# Altium PCB Holiday r2.PcbDoc (part 2 of 3)
Units mil, origin at the board's own origin, x right, y up, seen from the top; angles counter-clockwise.
Board outline 2637.8 x 2637.8 mil, 4 copper layers (Top Layer, Mid-Layer 1, InternalPlane1, Bottom Layer), stack 63.08 mil thick; 132 components, 142 nets, 636 pads, 407 vias.
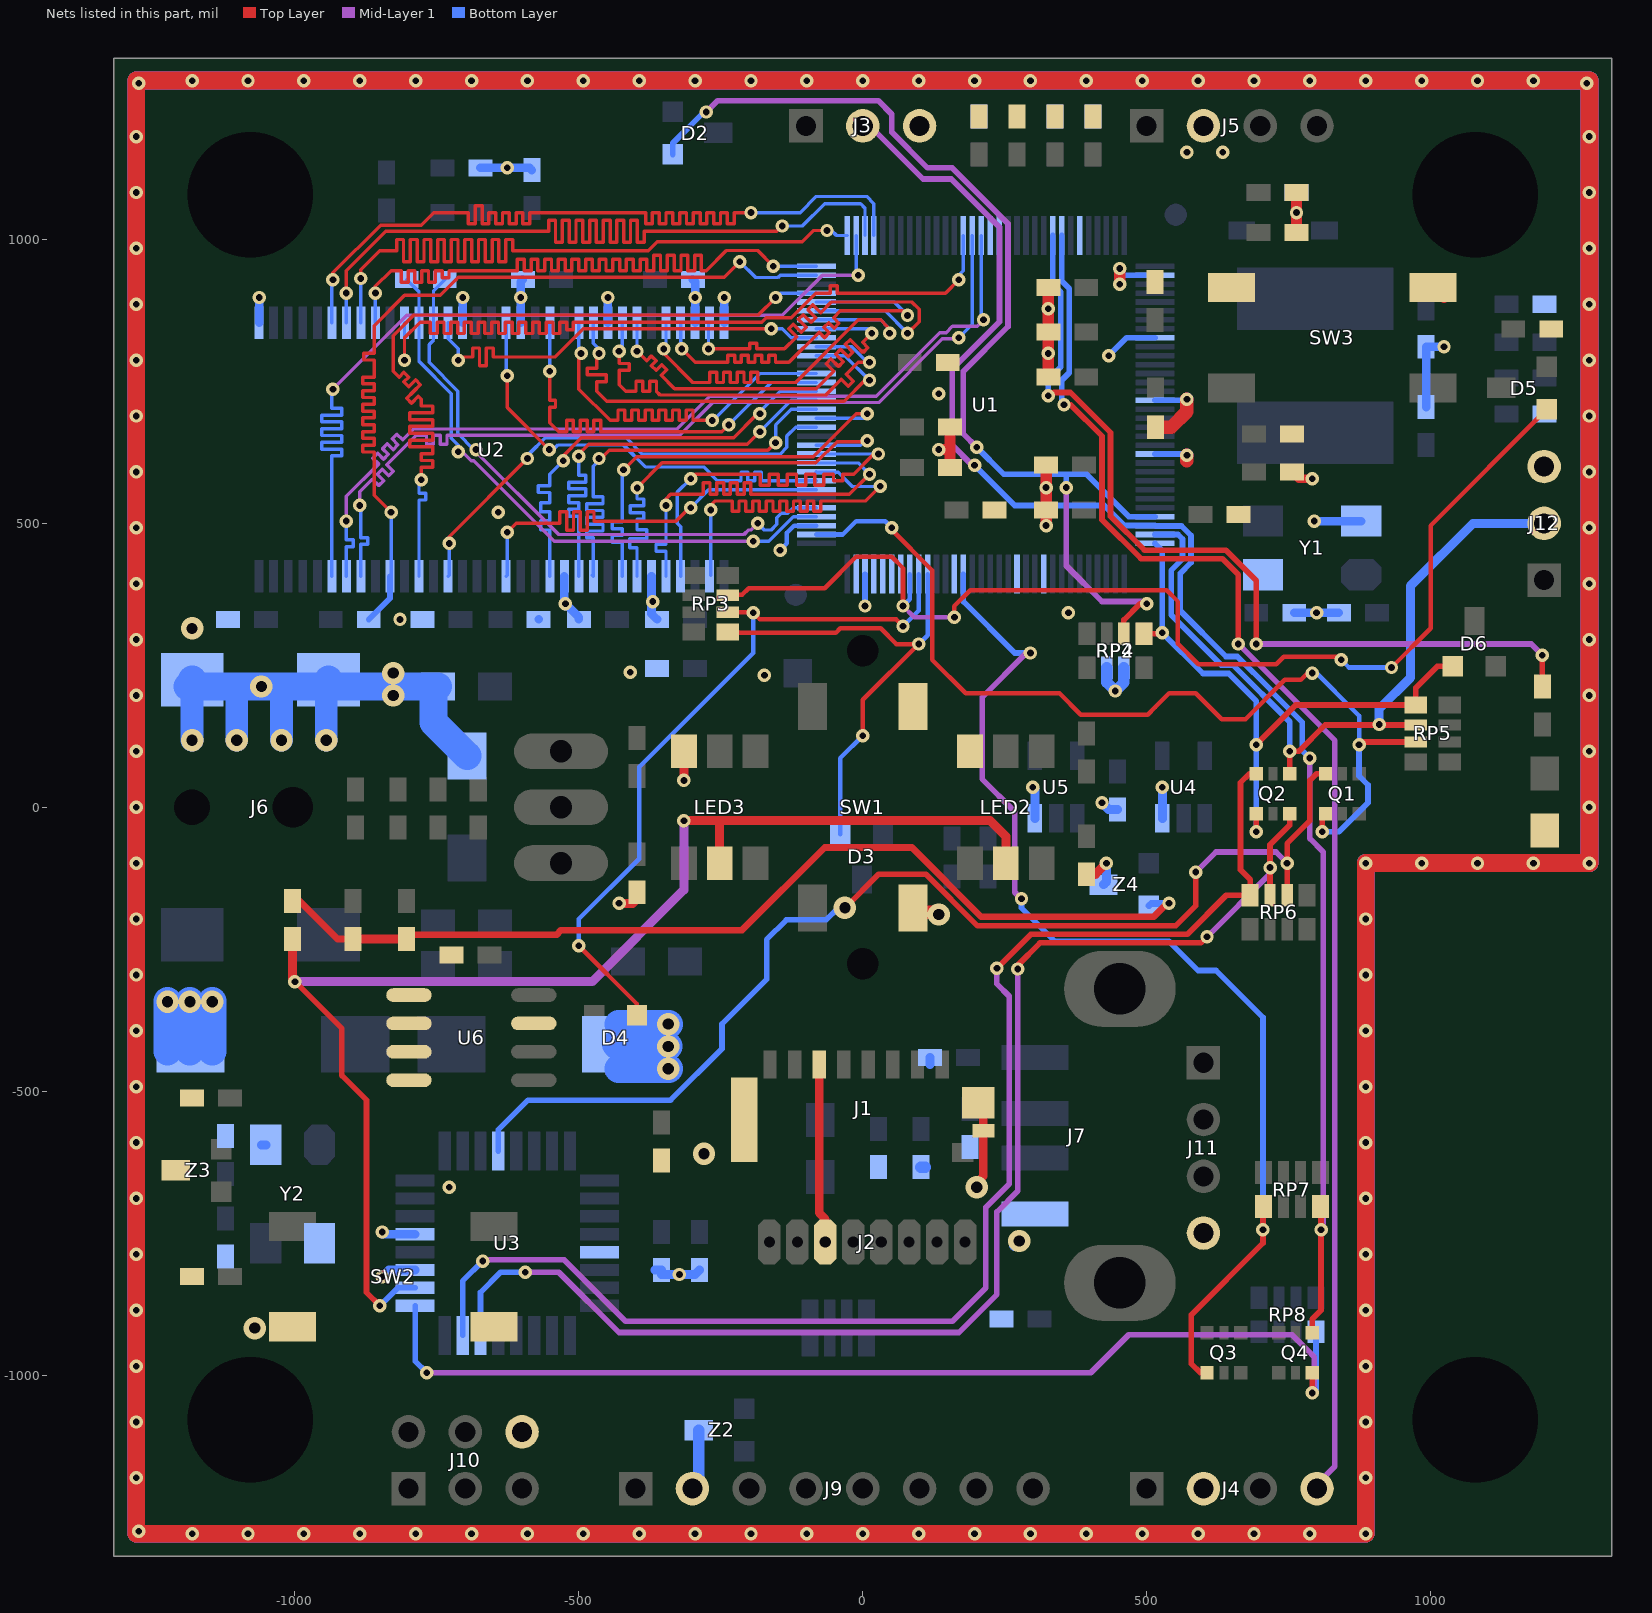
[diagram p4: the nets of this part, all layers, seen from the top]

## Via types
v1: diameter 23.62, hole 11.81, Top Layer to Bottom Layer, tented both sides, 373 vias
v2: diameter 39.37, hole 19.68, Top Layer to Bottom Layer, tented both sides, 33 vias
v3: diameter 35.43, hole 19.68, Top Layer to Bottom Layer, tented both sides, 1 vias

## Nets (pads, with @x,y where several pads share a name; then routed paths per layer and width w, separated by ;. In a path a pad name is that pad's centre, name@x,y a point inside that pad or via, vN(x,y) a via of type N, cw(c..) or ccw(c..) an arc to the next point about the centre after c; other vN are vias at no path point) (continued)
A8: U1.68 U2.39 | length 1645.9
  Top Layer w6: v1(-933.07,929.13) -933.07,940.94 -848.89,1025.13 -777.77,1025.13 -755.66,1047.24 -694.47,1047.24 -694.47,1027.9 -682.47,1027.9 -682.47,1059.24 -670.47,1059.24 -670.47,1027.9 -658.47,1027.9 -658.47,1047.24 -646.47,1047.24 -646.47,1027.9 -634.47,1027.9 -634.47,1047.24 -622.47,1047.24 -622.47,1027.9 -610.47,1027.9 -610.47,1047.24 -598.47,1047.24 -598.47,1027.9 -586.47,1027.9 -586.47,1047.24 -382.47,1047.24 -382.47,1027.9 -370.47,1027.9 -370.47,1047.24 -358.47,1047.24 -358.47,1027.9 -346.47,1027.9 -346.47,1047.24 -334.47,1047.24 -334.47,1027.9 -322.47,1027.9 -322.47,1047.24 -310.47,1047.24 -310.47,1027.9 -298.47,1027.9 -298.47,1047.24 -286.47,1047.24 -286.47,1027.9 -274.47,1027.9 -274.47,1047.24 -262.47,1047.24 -262.47,1027.9 -250.47,1027.9 -250.47,1047.24 -238.47,1047.24 -238.47,1027.9 -226.47,1027.9 -226.47,1047.24 v1(-196.85,1047.24)
  Bottom Layer w6: U2.39@-935.04,853.35 v1@-935.04,929.13 ; v1(-196.85,1047.24) -157.94,1047.24 -157.81,1047.12 -110.36,1047.12 -81.87,1075.61 7.06,1075.61 19.69,1062.99 U1.68@19.69,1006.89
A9: U1.67 U2.40 | length 1645.9
  Top Layer w6: v1(-909.45,905.51) -909.45,944.88 -840.2,1014.13 -553.06,1014.13 -553.06,1033.43 -541.06,1033.43 -541.06,994.82 -529.06,994.82 -529.06,1033.43 -517.06,1033.43 -517.06,994.82 -505.06,994.82 -505.06,1033.43 -493.06,1033.43 -493.06,994.82 -481.06,994.82 -481.06,1033.43 -469.06,1033.43 -469.06,994.82 -457.06,994.82 -457.06,1033.43 -445.06,1033.43 -445.06,994.82 -433.06,994.82 -433.06,1033.43 -421.06,1033.43 -421.06,994.82 -409.06,994.82 -409.06,1033.43 -397.06,1033.43 -397.06,994.82 -385.06,994.82 -385.06,1014.13 -151.23,1014.13 v1(-141.73,1023.62)
  Bottom Layer w6: U2.40@-909.45,853.35 v1(-909.45,905.51) ; v1(-141.73,1023.62) -106.3,1023.62 -66.93,1062.99 -3.94,1062.99 3.94,1055.12 U1.67@3.94,1006.89
A10: U1.66 U2.28 | length 1660.8
  Mid-Layer 1 w6: v1(-933.07,736.22) -803.15,866.14 -141.73,866.14 -70.87,937.01 v1(-7.87,937.01)
  Bottom Layer w6: U2.28@-935.04,406.5 -935.04,618.66 -917.37,618.66 -917.37,630.66 -952.71,630.66 -952.71,642.66 -917.37,642.66 -917.37,654.66 -952.71,654.66 -952.71,666.66 -917.37,666.66 -917.37,678.66 -952.71,678.66 -952.71,690.66 -917.37,690.66 -917.37,702.66 -935.04,702.66 -935.04,736.22 v1@-935.04,737.2 ; v1@-935.04,738.19 v1(-933.07,736.22) ; U1.66@-11.81,1006.89 -11.81,940.95 v1(-7.87,937.01)
A11: U1.65 U2.41 | length 1645.9
  Top Layer w6: v1(-883.86,931.1) -883.86,946.85 -850.39,980.32 -820.77,980.32 -820.77,999.84 -808.77,999.84 -808.77,960.79 -796.77,960.79 -796.77,999.84 -784.77,999.84 -784.77,960.79 -772.77,960.79 -772.77,999.84 -760.77,999.84 -760.77,960.79 -748.77,960.79 -748.77,999.84 -736.77,999.84 -736.77,960.79 -724.77,960.79 -724.77,999.84 -712.77,999.84 -712.77,960.79 -700.77,960.79 -700.77,999.84 -688.77,999.84 -688.77,960.79 -676.77,960.79 -676.77,999.84 -664.77,999.84 -664.77,960.79 -652.77,960.79 -652.77,999.84 -640.77,999.84 -640.77,960.79 -628.77,960.79 -628.77,999.84 -616.77,999.84 -616.77,980.32 -377.95,980.32 -362.2,996.06 -106.3,996.06 -86.61,1015.75 v1(-62.99,1015.75)
  Bottom Layer w6: U2.41@-883.86,853.35 v1(-883.86,931.1) ; v1(-62.99,1015.75) -55.12,1015.75 -46.26,1006.89 U1.65@-27.56,1006.89
A12: U1.64 U2.42 | length 1642.8
  Top Layer w6: v1(-858.27,905.51) -858.27,917.32 -830.71,944.88 -812.71,944.88 -812.71,924.88 -800.71,924.88 -800.71,944.88 -788.71,944.88 -788.71,924.88 -776.71,924.88 -776.71,944.88 -764.71,944.88 -764.71,924.88 -752.71,924.88 -752.71,944.88 -740.71,944.88 -740.71,932.78 -728.71,932.78 -728.71,944.88 -608.17,944.88 -608.17,964.88 -596.17,964.88 -596.17,944.88 -584.17,944.88 -584.17,964.88 -572.17,964.88 -572.17,944.88 -560.17,944.88 -560.17,964.88 -548.17,964.88 -548.17,944.88 -536.17,944.88 -536.17,964.88 -524.17,964.88 -524.17,944.88 -512.17,944.88 -512.17,964.88 -500.17,964.88 -500.17,944.88 -488.17,944.88 -488.17,964.88 -476.17,964.88 -476.17,944.88 -464.17,944.88 -464.17,964.88 -452.17,964.88 -452.17,944.88 -440.17,944.88 -440.17,964.88 -428.17,964.88 -428.17,944.88 -416.17,944.88 -416.17,964.88 -404.17,964.88 -404.17,944.88 -392.17,944.88 -392.17,964.88 -380.17,964.88 -380.17,944.88 -368.17,944.88 -368.17,972.44 -356.17,972.44 -356.17,944.88 -344.17,944.88 -344.17,972.44 -332.17,972.44 -332.17,944.88 -320.17,944.88 -320.17,972.44 -308.17,972.44 -308.17,944.88 -296.17,944.88 -296.17,972.44 -284.17,972.44 -284.17,944.88 -275.59,944.88 -240.03,980.44 -185.17,980.44 v1(-157.48,952.76)
  Bottom Layer w6: U2.42@-858.27,853.35 v1(-858.27,905.51) ; v1(-157.48,952.76) U1.64@-81.69,952.76
A_RXD: D6.1 Q2.4 RP4.1.1 RP5.1.1 U1.128 | length 1094.3
  Top Layer w10: RP4.1.1@494.88,305.59 526.06,305.59 v1(527.56,307.09) ; v1(692.91,-43.31) Q2.4@692.91,-11.81 ; v1(692.91,110.24) 762.6,179.92 RP5.1.1@973.94,179.92 973.94,210.16 1011.81,248.03 D6.1@1039.37,248.03
  Bottom Layer w10: U1.128@514.76,464.57 527.56,451.77 v1(527.56,307.09) 599.06,235.59 644.41,235.59 692.91,187.09 v1(692.91,110.24) v1(692.91,-43.31)
A_RXD_5V: Q2.3 RP6.4.1 U3.31 | length 2429.6
  Top Layer w10: v1(236.22,-283.46) 295.77,-223.92 571.36,-223.92 640.24,-155.04 RP6.4.1@682.28,-155.04 682.28,-127.17 665.35,-110.24 665.35,43.31 681.1,59.05 Q2.3@692.91,59.05
  Mid-Layer 1 w10: v1(-669.29,-799.21) -667.17,-797.09 -525.75,-797.09 -417.32,-905.51 157.48,-905.51 216.54,-846.46 216.54,-704.72 258.03,-663.23 258.03,-332.83 236.22,-311.02 v1(236.22,-283.46)
  Bottom Layer w10: U3.31@-704.73,-930.12 -704.73,-834.65 v1(-669.29,-799.21)
A_TXD: J12.2 Q2.1 RP5.2.1 U1.127 | length 1360.9
  Top Layer w10: Q2.1@751.97,59.05 v1(751.97,98.43) 767.72,98.43 814.21,144.92 RP5.2.1@973.94,144.92
  Bottom Layer w10: U1.127@514.76,480.32 555.12,480.32 562.99,472.44 562.99,437.01 543,417.02 543,339 631.41,250.59 651.86,250.59 751.97,150.48 v1(751.97,98.43)
  Bottom Layer w16: v1(909.45,145.67) 909.45,173.23 964.57,228.35 964.57,389.76 1074.8,500 J12.2@1200,500
A_TXD_5V: Q2.6 RP6.3.1 U3.30 | length 2346.5
  Top Layer w10: v1(273.03,-284.84) 273.03,-278.15 312.26,-238.92 595.73,-238.92 v1(606.3,-228.35) ; RP6.3.1@717.28,-155.04 v1(717.28,-106.3) 717.28,-66.18 751.97,-31.5 Q2.6@751.97,-11.81
  Mid-Layer 1 w10: v1(-594.49,-818.9) -535.43,-818.9 -429.13,-925.2 169.29,-925.2 236.22,-858.27 236.22,-712.6 273.03,-675.79 v1(273.03,-284.84) ; v1(606.3,-228.35) 716.54,-118.11 716.54,-107.05 v1(717.28,-106.3)
  Bottom Layer w10: U3.30@-673.23,-930.12 -673.23,-854.33 -637.8,-818.9 v1(-594.49,-818.9)
BA0: U1.79 U2.26 | length 1660.8
  Mid-Layer 1 w6: v1(-885.83,531.5) -885.83,555.58 -863.49,577.92 -852.14,566.57 -843.65,575.06 -855,586.4 -846.51,594.89 -835.17,583.54 -826.68,592.03 -838.03,603.37 -786.24,655.17 -768.24,655.17 -768.24,639.12 -756.24,639.12 -756.24,655.17 -744.24,655.17 -744.24,639.12 -732.24,639.12 -732.24,655.17 -322.17,655.17 -264.61,712.72 -172.9,712.72 -0.34,712.72 16.08,712.72 27.94,712.72 140.03,824.8 169.29,824.8 v1@171.26,824.8
  Bottom Layer w6: v1(-885.83,531.5) -883.86,529.53 -883.86,474.88 -871.86,474.88 -871.86,462.88 -883.86,462.88 U2.26@-883.86,406.5 ; v1(169.29,826.77) 192.79,850.27 192.79,1006.76 U1.79@192.91,1006.89
BA1: U1.80 U2.27 | length 1660.8
  Mid-Layer 1 w6: v1(-909.45,503.94) -909.45,547.51 -852.53,604.43 -862.77,614.66 -854.28,623.15 -844.05,612.91 -835.56,621.4 -845.8,631.63 -837.31,640.12 -827.08,629.88 -818.59,638.37 -828.83,648.61 -820.34,657.09 -810.11,646.85 -790.79,666.17 -326.73,666.17 -269.17,723.72 -168.34,723.72 -4.89,723.72 20.64,723.72 23.39,723.72 135.47,835.8 146.83,835.8 157.97,846.95 201.28,846.95 v1(212.6,858.27)
  Bottom Layer w6: U2.27@-909.45,406.5 -909.45,458.76 -897.45,458.76 -897.45,470.76 -909.45,470.76 v1(-909.45,503.94) ; U1.80@208.66,1006.89 208.66,858.27 208.66,854.33 v1(212.6,858.27)
CAS_N: U1.61 U2.22 | length 1660.8
  Top Layer w6: v1(-777.56,576.77) -777.56,598.6 -757.56,598.6 -757.56,610.6 -777.56,610.6 -777.56,622.6 -757.56,622.6 -757.56,634.6 -797.56,634.6 -797.56,646.6 -757.56,646.6 -757.56,658.6 -797.56,658.6 -797.56,670.6 -757.56,670.6 -757.56,682.6 -797.56,682.6 -797.56,694.6 -757.56,694.6 -757.56,706.6 -777.56,706.6 -777.56,718.5 -782.68,723.63 -794.72,711.59 -803.2,720.08 -791.17,732.11 -779.13,744.15 -787.62,752.63 -799.65,740.6 -808.14,749.08 -799.65,757.57 -808.14,766.05 -816.62,757.57 -826.9,767.84 -826.9,795.73 -826.77,795.86 -826.77,830.71 -790.65,866.83 -184.35,866.83 v1(-153.54,897.64)
  Bottom Layer w6: U2.22@-781.5,406.5 -781.5,541.06 -769.5,541.06 -769.5,553.06 -781.5,553.06 -781.5,576.77 v1(-777.56,576.77) ; v1(-153.54,897.64) -145.67,905.51 U1.61@-81.69,905.51
CKE: U1.78 U2.44 | length 1658.4
  Top Layer w6: v1(-807.09,787.4) -807.09,826.77 -779.53,854.33 -761.53,854.33 -761.53,834.33 -749.53,834.33 -749.53,854.33 -737.53,854.33 -737.53,834.33 -725.53,834.33 -725.53,854.33 -713.53,854.33 -713.53,834.33 -701.53,834.33 -701.53,854.33 -689.53,854.33 -689.53,834.33 -677.53,834.33 -677.53,854.33 -665.53,854.33 -665.53,834.33 -653.53,834.33 -653.53,854.33 -641.53,854.33 -641.53,834.33 -629.53,834.33 -629.53,854.33 -617.53,854.33 -617.53,834.33 -605.53,834.33 -605.53,854.33 -593.53,854.33 -593.53,834.33 -581.53,834.33 -581.53,854.33 -569.53,854.33 -569.53,834.33 -557.53,834.33 -557.53,854.33 -545.53,854.33 -545.53,834.33 -533.53,834.33 -533.53,854.33 -521.53,854.33 -521.53,840.67 -509.53,840.67 -509.53,854.33 -177.62,854.33 -169.62,862.33 -125.86,862.33 -82.68,905.51 -56.99,905.51 -56.99,918.49 -44.99,918.49 -44.99,905.51 145.67,905.51 v1(169.29,929.13)
  Bottom Layer w6: v1(-807.09,787.4) U2.44@-807.09,853.35 ; v1(169.29,929.13) 169.29,937.01 177.17,944.88 U1.78@177.17,1006.89
CLK_N: R3.1 U1.37 U2.46 | length 1052.7
  Mid-Layer 1 w6: v1(-681.1,629.92) -685.04,629.92 -683.07,627.95 -535.43,480.32 -209.12,480.32 -201.12,488.31 -196.72,488.31 v1(-185.04,500)
  Bottom Layer w6: R3.1@-736.22,929.13 -755.91,909.45 U2.46@-755.91,853.35 -755.91,822.83 -763.78,814.96 -763.78,783.27 -713.41,732.9 -713.41,658.29 -685.04,629.92 v1(-681.1,629.92) ; v1(-185.04,500) -173.23,488.19 -161.42,488.19 -151.57,498.03 -151.57,509.84 -143.7,517.72 -131.89,517.72 -122.05,527.56 U1.37@-81.69,527.56
CLK_P: R3.2 U1.36 U2.45 | length 1052.6
  Mid-Layer 1 w6: v1@-708.89,629.69 -689.31,610.11 -684.91,610.11 -543.31,468.5 v1(-192.91,468.5)
  Bottom Layer w6: R3.2@-803.13,929.13 -781.5,907.5 U2.45@-781.5,853.35 -781.5,785.43 -724.41,728.35 -724.41,649.61 -712.6,637.8 v1(-712.6,625.98) ; v1(-192.91,468.5) -165.35,468.5 -122.05,511.81 U1.36@-81.69,511.81
CS_N: R2.1 U1.63 U2.24 | length 1658.5
  Top Layer w6: v1(-830.71,519.68) -860.58,549.56 -860.58,625.59 -880.58,625.59 -880.58,637.59 -860.58,637.59 -860.58,649.59 -880.58,649.59 -880.58,661.59 -860.58,661.59 -860.58,673.59 -880.58,673.59 -880.58,685.59 -860.58,685.59 -860.58,697.59 -880.58,697.59 -880.58,709.59 -860.58,709.59 -860.58,721.59 -880.58,721.59 -880.58,733.59 -860.58,733.59 -860.58,745.59 -880.58,745.59 -880.58,757.59 -860.58,757.59 -860.58,787.59 -878.81,787.59 -878.81,799.59 -860.58,799.59 -860.58,848.08 -807.09,901.57 -744.09,901.57 -735.54,910.13 -735.54,910.4 -717.49,928.45 -717.22,928.45 -712.6,933.07 -244.09,933.07 v1(-216.54,960.63)
  Bottom Layer w6: U2.24@-830.71,408.46 v1(-830.71,519.68) ; v1(-216.54,960.63) -188.85,932.94 -149.27,932.94 -145.21,937.01 U1.63@-81.69,937.01
  Bottom Layer w10: R2.1@-870.08,330.71 -832.68,368.11 U2.24@-832.68,406.5
D0: U1.41 U2.2 | length 823.9
  Top Layer w6: v1(-267.72,523.62) -267.72,531.5 -259.84,539.37 -230.03,539.37 -230.03,520.97 -218.03,520.97 -218.03,539.37 -206.03,539.37 -206.03,520.97 -194.03,520.97 -194.03,539.37 -182.03,539.37 -182.03,521.18 -170.03,521.18 -170.03,539.37 -158.03,539.37 -158.03,520.97 -146.03,520.97 -146.03,539.37 -134.03,539.37 -134.03,520.97 -122.03,520.97 -122.03,539.37 -110.03,539.37 -110.03,520.97 -98.03,520.97 -98.03,539.37 -86.03,539.37 -86.03,520.97 -74.03,520.97 -74.03,539.37 5.04,539.37 v1(30.79,565.12)
  Bottom Layer w6: U2.2@-267.72,408.46 v1(-267.72,523.62) v1@-267.72,531.5 ; U1.41@-81.69,590.55 -80.87,589.73 -43.1,589.73 -18.18,564.8 30.48,564.8 v1(30.79,565.12)
D1: U1.43 U2.4 | length 823.9
  Top Layer w6: v1(-303.15,578.74) -295.28,586.61 -180.72,586.61 -180.72,566.93 -164.72,566.93 -164.72,586.61 -148.72,586.61 -148.72,566.93 -132.72,566.93 -132.72,586.61 -116.72,586.61 -116.72,566.93 -100.72,566.93 -100.72,586.61 -84.72,586.61 -84.72,566.93 -68.72,566.93 -68.72,586.61 -51.56,586.61 -51.56,574.61 -35.56,574.61 -35.56,586.61 -16.21,586.61 19.23,622.05 v1(27.56,622.05)
  Bottom Layer w6: U2.4@-320.87,406.5 -320.87,494.09 -326.65,499.87 -326.65,539.83 -326.77,539.95 -326.77,555.12 v1(-303.15,578.74) ; U1.43@-81.69,622.05 v1(27.56,622.05)
D2: U1.42 U2.5 | length 829.9
  Top Layer w6: v1(-346.46,531.5) -346.46,543.31 -338.58,551.18 -281.02,551.18 -281.02,571.18 -269.02,571.18 -269.02,551.18 -257.02,551.18 -257.02,571.18 -245.02,571.18 -245.02,551.18 -233.02,551.18 -233.02,571.18 -221.02,571.18 -221.02,551.18 -209.02,551.18 -209.02,571.18 -197.02,571.18 -197.02,551.18 -23.62,551.18 v1(11.81,586.61)
  Mid-Layer 1 w6: v1(11.81,586.61) v1@11.81,594.49
  Bottom Layer w6: U2.5@-346.46,406.5 -346.46,450.88 -364.2,450.88 -364.2,462.88 -346.46,462.88 v1(-346.46,531.5) v1@-346.46,543.31 ; U1.42@-81.69,606.3 -7.87,606.3 v1(11.81,586.61)
D3: U1.44 U2.7 | length 830.8
  Top Layer w6: v1(-396.99,562.34) -396.99,562.99 -353.56,606.42 -82.75,606.42 -45.31,643.86 2.13,643.86 5.9,647.64 7.87,649.61 v1(7.87,645.67)
  Bottom Layer w6: U2.7@-397.64,406.5 -397.64,456.82 -410.07,456.82 -410.07,472.82 -380.11,472.82 -380.11,488.82 -397.64,488.82 -397.64,506.82 -385.64,506.82 -385.64,518.82 -409.64,518.82 -409.64,530.82 -385.64,530.82 -385.64,542.82 -397.64,542.82 v1@-397.64,561.69 ; U1.44@-81.69,637.8 -3.94,637.8 5.9,647.64 7.87,649.61 v1(7.87,645.67)
D4: U1.47 U2.8 | length 830.8
  Top Layer w6: v1(-421.26,594.49) -398.33,617.42 -87.31,617.42 -11.81,692.91 v1(7.87,692.91)
  Bottom Layer w6: U2.8@-423.23,406.5 -423.23,466.63 -441.49,466.63 -441.49,478.63 -423.23,478.63 -423.23,490.63 -441.49,490.63 -441.49,502.63 -423.23,502.63 -423.23,592.52 v1(-421.26,594.49) ; U1.47@-81.69,685.04 3.94,685.04 v1@7.87,688.98 ; v1@7.87,685.04 v1@7.87,688.98 ; v1(7.87,692.91) v1@7.87,688.98
D5: U1.48 U2.10 | length 830.8
  Top Layer w6: v1(-464.57,614.17) -464.57,610.24 -462.6,612.2 -446.39,628.42 -166.86,628.42 v1(-153.54,641.73)
  Bottom Layer w6: U2.10@-476.38,408.46 U2.10@-474.41,406.5 -474.41,474.5 -486.41,474.5 -486.41,486.5 -457.49,486.5 -457.49,498.5 -486.41,498.5 -486.41,510.5 -457.49,510.5 -457.49,522.5 -486.41,522.5 -486.41,534.5 -457.49,534.5 -457.49,546.5 -474.41,546.5 -474.41,600.39 -464.57,610.24 v1(-464.57,614.17) ; v1(-153.54,641.73) -153.54,673.23 -125.98,700.79 U1.48@-81.69,700.79
D6: U1.49 U2.11 | length 830.8
  Top Layer w6: v1@-501.74,620.31 -482.63,639.42 -203.1,639.42 v1(-181.1,661.42) ; v1(-500,618.11) -499.54,618.11 v1@-496.19,614.76
  Bottom Layer w6: U2.11@-500,406.5 -500,512.55 -517.69,512.55 -517.69,524.55 -500,524.55 -500,536.55 -517.69,536.55 -517.69,548.55 -488,548.55 -488,560.55 -517.69,560.55 -517.69,572.55 -488,572.55 -488,584.55 -500,584.55 v1(-500,618.11) ; v1(-181.1,661.42) -138.12,704.4 -125.98,716.54 U1.49@-81.69,716.54
D7: U1.50 U2.13 | length 827.3
  Top Layer w6: v1(-527.56,610.24) -527.56,618.57 -495.71,650.42 -227.54,650.42 -188.98,688.98 -185.04,688.98 v1(-181.1,692.91)
  Bottom Layer w6: U2.13@-551.18,406.5 -551.18,488.32 -566.92,488.32 -566.92,504.32 -551.18,504.32 -551.18,520.32 -566.92,520.32 -566.92,536.32 -551.18,536.32 -551.18,554.32 -571.18,554.32 -571.18,566.32 -551.18,566.32 -551.18,586.61 v1(-527.56,610.24) ; v1@-188.98,688.98 -183.07,694.88 -145.67,732.28 U1.50@-81.69,732.28
D8: U1.51 U2.54 | length 828.1
  Top Layer w6: v1(-551.18,767.72) -551.18,716.44 -541.18,716.44 -541.18,704.44 -551.18,704.44 -551.18,677.16 -535.43,661.42 -521.56,661.42 -521.56,681.42 -509.56,681.42 -509.56,661.42 -497.56,661.42 -497.56,681.42 -485.56,681.42 -485.56,661.42 -473.56,661.42 -473.56,681.42 -461.56,681.42 -461.56,661.42 -248.03,661.42 v1(-236.22,673.23)
  Bottom Layer w6: v1(-551.18,767.72) U2.54@-551.18,853.35 ; v1(-236.22,673.23) -161.42,748.03 U1.51@-81.69,748.03
D9: U1.52 U2.56 | length 823.9
  Top Layer w6: v1(-496.06,799.21) -500,799.21 -500,736.22 -445.01,681.23 -431.01,681.23 -431.01,699.59 -419.01,699.59 -419.01,681.23 -407.01,681.23 -407.01,699.59 -395.01,699.59 -395.01,681.23 -383.01,681.23 -383.01,699.59 -371.01,699.59 -371.01,681.23 -359.01,681.23 -359.01,699.59 -347.01,699.59 -347.01,681.23 -335.01,681.23 -335.01,699.59 -323.01,699.59 -323.01,681.23 -311.01,681.23 -311.01,699.59 -299.01,699.59 -299.01,681.23 v1(-264.84,681.23)
  Bottom Layer w6: U2.56@-500,853.35 -500,807.09 -501.97,805.12 -503.94,803.15 -500,799.21 v1(-496.06,799.21) ; v1(-264.84,681.23) -263.65,681.23 -181.1,763.78 U1.52@-81.69,763.78
D10: U1.54 U2.57 | length 825.6
  Top Layer w6: v1(-464.57,799.21) -460.63,799.21 -462.6,797.24 -468.5,791.34 -468.5,773.34 -485.49,773.34 -485.49,761.34 -451.51,761.34 -451.51,749.34 -468.5,749.34 -468.5,732.28 -451.25,715.03 -33,715.03 v1@3.94,751.97
  Mid-Layer 1 w6: v1@3.94,751.97 v1(11.81,751.97)
  Bottom Layer w6: U2.57@-474.41,853.35 -474.41,816.93 -460.63,803.15 -460.63,799.21 -460.63,795.28 v1(-464.57,799.21) ; U1.54@-81.69,795.28 -31.5,795.28 v1(11.81,751.97)
D11: U1.55 U2.59 | length 823.9
  Top Layer w6: v1(-429.13,803.15) -429.13,781.4 -411.19,781.4 -411.19,769.4 -429.13,769.4 -429.13,744.09 -417.32,732.28 -399.32,732.28 -399.32,750.23 -387.32,750.23 -387.32,732.28 -375.32,732.28 -375.32,750.23 -363.32,750.23 -363.32,732.28 -357.07,726.03 -65.31,726.03 -37.57,753.76 -25.53,741.72 -17.04,750.2 -29.09,762.25 -7.88,783.46 v1(11.81,783.46)
  Bottom Layer w6: v1(-429.13,803.15) -423.23,809.05 U2.59@-423.23,853.35 ; U1.55@-81.69,811.02 -19.69,811.02 v1@5.91,785.43
D12: U1.57 U2.60 | length 824.4
  Top Layer w6: v1(-397.64,803.15) -380.7,786.22 -372.22,794.7 -363.73,786.22 -372.22,777.73 -363.73,769.24 -353.83,779.15 -345.34,770.67 -355.25,760.76 -331.52,737.03 -81.86,737.03 -51.22,767.68 -64.66,781.13 -56.18,789.61 -42.73,776.16 -34.25,784.65 -47.69,798.1 -39.21,806.58 -25.76,793.14 -17.28,801.62 -30.72,815.07 -22.24,823.55 -8.79,810.11 0.46,800.86 8.94,809.34 -0.3,818.59 v1(15.75,834.64)
  Bottom Layer w6: v1(-397.64,803.15) U2.60@-397.64,853.35 ; U1.57@-81.69,842.52 7.87,842.52 v1(15.75,834.64)
D13: U1.58 U2.62 | length 824.4
  Top Layer w6: v1(-350.39,807.09) -350.39,799.21 -299.21,748.03 -269.21,748.03 -269.21,765.78 -257.21,765.78 -257.21,748.03 -245.21,748.03 -245.21,765.78 -233.21,765.78 -233.21,748.03 -221.21,748.03 -221.21,765.78 -209.21,765.78 -209.21,748.03 -197.21,748.03 -197.21,765.78 -185.21,765.78 -185.21,748.03 -118.11,748.03 -7.87,858.27 31.5,858.27 43.48,846.28 43.48,834.64 v1(47.24,834.64)
  Bottom Layer w6: v1(-350.39,807.09) -346.46,811.02 U2.62@-346.46,853.35 ; U1.58@-81.69,858.27 31.5,858.27 43.48,846.28 43.48,834.64 v1(47.24,834.64)
D14: U1.60 U2.63 | length 824.4
  Top Layer w6: v1(-318.9,807.09) -295.28,783.46 -237.72,783.46 -237.72,796.09 -225.72,796.09 -225.72,783.46 -213.72,783.46 -213.72,796.09 -201.72,796.09 -201.72,783.46 -189.72,783.46 -189.72,796.09 -177.72,796.09 -177.72,783.46 -165.72,783.46 -165.72,796.09 -153.72,796.09 -153.72,783.46 -129.92,783.46 -76.94,836.44 -67.4,826.9 -58.91,835.38 -68.46,844.93 -59.97,853.41 -50.43,843.87 -41.94,852.36 -51.49,861.9 -39.37,874.02 70.86,874.02 v1(78.74,866.14)
  Bottom Layer w6: U2.63@-320.87,853.35 -320.87,807.09 -320.87,805.12 v1(-318.9,807.09) ; U1.60@-81.69,889.76 55.12,889.76 v1(78.74,866.14)
D15: U1.59 U2.65 | length 829.4
  Top Layer w6: v1(-271.65,807.09) -198.72,807.09 -198.72,817.09 -186.72,817.09 -186.72,807.09 -137.8,807.09 -116.58,828.3 -130.72,842.44 -122.24,850.93 -108.1,836.79 -99.61,845.27 -113.49,859.15 -105,867.63 -91.13,853.76 -82.64,862.24 -96.52,876.12 -88.03,884.6 -74.16,870.73 -55.12,889.76 86.61,889.76 99.41,876.97 99.41,855.31 v1(78.74,834.64) v1@74.8,838.58
  Bottom Layer w6: v1(-271.65,807.09) -271.65,851.38 U2.65@-269.68,853.35 ; U1.59@-81.69,874.02 39.37,874.02 v1(78.74,834.64)
D_RXD: D2.1 RP4.2.1 U1.125 | length 1962.6
  Top Layer w10: v1@354.33,559.06 v1(358.27,562.99) ; RP4.2.1@459.88,305.59 459.88,329.96 488.19,358.27 v1(500,358.27)
  Mid-Layer 1 w10: v1(-275.59,1224.41) -255.91,1244.09 27.56,1244.09 51.18,1220.47 51.18,1188.98 114.17,1125.98 157.48,1125.98 255.91,1027.56 255.91,846.46 177.17,767.72 177.17,657.48 v1(200.79,633.86) ; v1(358.27,562.99) 358.27,425.2 421.26,362.2 496.06,362.2 v1(500,358.27)
  Bottom Layer w10: D2.1@-334.64,1149.61 -334.64,1169.29 -279.53,1224.41 v1(-275.59,1224.41) ; v1(200.79,633.86) 248.03,586.61 358.27,586.61 ; v1(358.27,562.99) 358.27,586.61 ; U1.125@514.76,511.81 468.5,511.81 393.7,586.61 358.27,586.61
D_TXD: J3.2 Q4.1 RP7.4.1 U1.126 | length 2796.9
  Top Layer w10: Q4.1@791.34,-925.2 791.34,-901.57 807.09,-885.83 v1(807.09,-744.09) 807.09,-704.41 RP7.4.1@805.91,-703.23
  Mid-Layer 1 w10: J3.2@0,1200 12.6,1200 106.3,1106.3 155.95,1106.3 240.91,1021.35 240.91,855.08 157.48,771.65 157.48,637.8 192.91,602.36 v1(196.85,602.36) ; v1(787.4,86.61) 787.4,-55.12 811.02,-78.74 811.02,-740.16 v1(807.09,-744.09)
  Bottom Layer w10: v1(196.85,602.36) 267.72,531.5 425.2,531.5 460.63,496.06 U1.126@514.76,496.06 515.51,495.32 561.33,495.32 577.99,478.65 577.99,430.79 559,411.8 559,346 639.41,265.59 659.61,265.59 719.71,205.49 719.71,203.96 773.78,149.89 773.78,100.24 v1(787.4,86.61)
D_TXD_5V: Q4.6 RP8.1.1 U3.1 | length 1943.2
  Top Layer w10: v1(791.34,-1031.5) Q4.6@791.34,-996.06
  Mid-Layer 1 w10: v1(-767.72,-996.06) 401.57,-996.06 468.5,-929.13 755.91,-929.13 795.28,-968.5 795.28,-1023.62 v1@789.37,-1029.53
  Bottom Layer w10: U3.1@-788.39,-877.95 -788.39,-975.39 v1(-767.72,-996.06) ; v1(791.34,-1031.5) 798.03,-1024.8 RP8.1.1@798.03,-923.7
DEBUG: J4.4 U1.89 | length 2520.9
  Top Layer w10: v1(354.33,708.66) 366.14,708.66 421.26,653.54 421.26,506.35 489.85,437.76 633.11,437.76 661.42,409.45 v1(661.42,287.4)
  Mid-Layer 1 w10: v1(661.42,287.4) 831.46,117.36 831.46,-1160.67 800,-1192.13 J4.4@800,-1200
  Bottom Layer w10: U1.89@350.39,1006.89 350.39,926.73 363.58,913.54 363.58,765.16 350.39,751.97 350.39,712.6 v1(354.33,708.66)
DOUT: LED2.2 LED3.2 R9.2 U3.2 | length 2358.7
  Top Layer w10: v1(-1000,-307.09) -917.32,-389.76 -917.32,-472.44 -874.02,-515.75 -874.02,-854.33 v1(-850.39,-877.95)
  Top Layer w16: R9.2@-1003.94,-232.27 -1003.94,-303.15 v1(-1000,-307.09) ; v1(-314.96,-23.62) -251.97,-23.62 ; LED3.2@-251.97,-98.43 -251.97,-23.62 ; LED2.2@251.97,-98.43 251.97,-51.18 224.41,-23.62 -251.97,-23.62
  Mid-Layer 1 w16: v1(-1000,-307.09) -476.38,-307.09 -314.96,-145.67 v1(-314.96,-23.62)
  Bottom Layer w10: v1(-850.39,-877.95) -818.9,-846.46 U3.2@-788.39,-846.46
DOUT2: L6.1 R9.1 R15.1 Z4.2 | length 1728.3
  Top Layer w12: L6.1@-803.15,-224.66 -539.37,-224.66 -531.24,-216.54 -212.6,-216.54 -66.93,-70.87 86.61,-70.87
  Top Layer w12.01: R9.1@-1003.94,-165.35 -992.13,-165.35 -925.21,-232.27 R15.1@-897.64,-232.27 ; 86.61,-70.87 208.66,-192.91 511.81,-192.91 v1@535.43,-169.29
  Top Layer w16: R15.1@-897.64,-232.27 L6.1@-803.15,-232.28
  Bottom Layer w12.01: Z4.2@503.94,-173.43 508.07,-169.29 v1(539.37,-169.29)
DQM0: U1.46 U2.20 | length 826.7
  Top Layer w6: v1(-728.35,464.57) -728.35,476.38 v1(-590.55,614.17)
  Bottom Layer w6: U2.20@-730.31,406.5 -728.35,408.46 v1(-728.35,464.57) ; v1@-587.82,622.05 -559.45,650.42 -416.51,650.42 -388.02,621.92 -145.34,621.92 -133.63,633.63 -133.63,653.77 -118.11,669.29 U1.46@-81.69,669.29
DQM1: U1.56 U2.47 | length 825.6
  Top Layer w6: v1@-712.6,792.96 -686.91,792.96 -686.91,808.7 -674.91,808.7 -674.91,777.23 -662.91,777.23 -662.91,808.7 -650.91,808.7 -650.91,792.96 -541.68,792.96 -492.13,842.52 v1(-161.42,842.52)
  Bottom Layer w6: U2.47@-730.31,853.35 -730.31,824.8 -712.6,807.09 v1(-712.6,787.4) ; v1(-161.42,842.52) -141.73,842.52 -125.98,826.77 U1.56@-81.69,826.77
DQS0: U1.39 U2.16 | length 833.1
  Top Layer w6: v1(-625.98,484.25) -610.24,500 -533.37,500 -533.37,520.31 -521.37,520.31 -521.37,487.56 -509.37,487.56 -509.37,520.31 -497.37,520.31 -497.37,487.56 -485.37,487.56 -485.37,520.31 -473.37,520.31 -473.37,503.94 -328.9,503.94 -304.21,528.62 v1@-300.15,532.68
  Mid-Layer 1 w6: v1(-303.15,527.56) -300.15,527.56 v1@-300.15,532.68
  Bottom Layer w6: U2.16@-627.95,406.5 -625.98,408.47 v1(-625.98,484.25) ; v1(-303.15,527.56) -271.65,559.06 U1.39@-81.69,559.06
DQS1: U1.40 U2.51 | length 823.9
  Top Layer w6: v1(-625.98,759.84) -625.98,703.98 v1(-551.93,629.92) v1@-544.8,629.92
  Bottom Layer w6: U2.51@-627.95,853.35 -627.95,761.81 v1(-625.98,759.84) ; v1(-551.93,629.92) -544.8,629.92 -536.8,637.92 -421.38,637.92 -382.7,599.24 -280.34,599.24 -255.91,574.8 -214.47,574.8 -214.47,590.33 -202.47,590.33 -202.47,574.8 -190.47,574.8 -190.47,590.33 -178.47,590.33 -178.47,574.8 U1.40@-81.69,574.8
GND: C1.2 C2.2 C3.2 C4.2 C5.2 C6.2 C7.2 C8.2 C9.2 C10.2 C11.2 C12.2 C13.2 C14.2 C15.2 C16.2 C17.2 C18.2 C19.2 C20.2 C21.2 C22.2 C23.2 C24.2 C25.2 C26.2 C27.2 C28.2 C29.2 C30.2 C31.2 C32.2 C33.2 C35.2 C36.2 C37.2 C38.2 C39.2 C40.2 C41.2 C42.2 C43.2 C44.2 C45.2 C46.2 C48.2 C49.1 C50.2 C51.2 C55.1 C56.1 C57.2 C58.1 C59.1 C60.1 J1.6 J1.G1 J1.G2 J1.G3 J2.6 J3.3 J4.2 J5.2 J6.2 J6.3 J7.4 J9.2 J10.6 J11.4 J12.3 L4.1 L7.1 LED1.K LED2.6 LED3.6 pad.0@1078.74,1078.74 pad.0@-1078.74,1078.74 pad.0@-1078.74,-1078.74 R5.2 R7.1 R12.1 RP2.2.2 RP2.3.2 SW1.3 SW1.4 SW2.3 SW2.4 SW3.3 SW3.4 U1.30 U1.35 U1.98 U1.105 U1.112 U1.118 U2.6 U2.12 U2.34 U2.48 U2.52 U2.58 U2.64 U2.66 U3.3 U3.5 U3.21 U4.3 U5.3 U6.1 U6.2 U6.3 U6.4 U6.7 Y1.2 Y1.4 Y2.2 Y2.4 Z1.1 Z2.3 Z3.3 Z4.3 | length 35475.8
  Top Layer w10: v1(452.76,921.26) v1@456.68,925.18
  Top Layer w15: J1.6@-76.77,-452.76 -76.77,-714.57 -65.95,-725.39 ; v2(200.79,-669.29) 200.79,-661.42 212.6,-649.61 J1.G3@212.6,-569.88 212.6,-529.53 J1.G2@203.74,-520.67 ; C31.2@755.89,590.55 767.72,578.74 v1(791.34,578.74) ; SW3.3@1004.33,914.96 SW3.3@1023.62,895.67
  Top Layer w15.75: U6.2@-801.97,-377.95 U6.2@-799.21,-380.71
  Top Layer w15.98: U6.4@-799.61,-480.31 U6.4@-799.21,-480.71 ; U6.1@-799.21,-330.71 U6.1@-795.26,-330.71
  Top Layer w16: v1(-429.13,-169.29) -405.51,-169.29 -397.64,-161.42 C49.1@-397.64,-149.61 ; v1(-314.96,47.24) LED3.6@-314.96,98.42 ; J1.G1@-219.68,-550.39 J1.G1@-208.66,-550.39 ; C55.1@393.7,-118.11 409.45,-118.11 v1(429.13,-98.43)
  Top Layer w20: v1(133.86,629.92) 153.53,629.92 ; C5.2@153.53,598.42 153.53,629.92 ; C32.2@153.53,669.29 153.53,629.92 ; v1@322.85,496.08 C1.2@322.85,523.62 v1@322.85,562.97 ; v1@322.85,562.99 C7.2@322.85,602.36 ; C20.2@326.79,757.87 C19.2@326.79,836.61 C18.2@326.79,915.35 ; v1(452.76,921.26) v1(452.76,948.82) ; C9.2@763.76,1011.81 v1(763.78,1047.24) C13.2@763.76,1082.68
  Top Layer w24: C38.2@515.75,669.31 543.32,669.31 570.87,696.85 v1(570.87,718.5) ; v1@570.87,610.24 v1(570.87,620.08)
  Top Layer w24.02: SW1.3@88.19,-177.56 98.03,-177.56 105.51,-185.04 137.8,-185.04 v2(133.86,-188.98)
  Top Layer w31.5: v1@1275,-98.43 v1(885.83,-98.43) v1(885.83,-1279.53) -1279.53,-1279.53 -1279.53,1279.53 1279.53,1279.53 v1(1279.53,-98.43)
  Mid-Layer 1 w31.5: v1@-1279.53,-1279.53 v1(885.83,-1279.53) v1(885.83,-98.43) v1(1279.53,-98.43) 1279.53,1279.53 -1279.53,1279.53 v1@-1279.53,-1279.53
  Bottom Layer w7.99: v1(-145.67,452.76) -133.86,464.57 -133.86,483.03 -120.83,496.06 U1.35@-81.69,496.06
  Bottom Layer w10: v1(3.94,354.33) U1.30@3.94,410.43 ; v1(433.07,795.28) 464.57,826.77 U1.105@514.76,826.77 ; v1(452.76,948.82) 452.76,937.01 U1.98@514.76,937.01 ; U1.118@514.76,622.05 568.9,622.05 v1(570.87,620.08) ; U1.112@514.76,716.54 568.9,716.54 v1(570.87,718.5)
  Bottom Layer w15: U2.34@-1062.99,853.35 v1(-1062.99,897.64) ; U2.48@-704.72,853.35 v1(-704.72,897.64) ; R5.2@-673.25,1125.98 v1(-625.98,1125.98) -586.63,1125.98 C36.2@-582.68,1122.03 ; U2.52@-602.36,853.35 -602.36,925.18 C28.2@-598.41,929.13 ; v1@-525.59,356.3 U2.12@-525.59,406.5 ; v1@-523.62,354.35 v1(-523.62,358.27) -499.98,334.63 C24.2@-499.98,330.71 ; U2.58@-448.82,853.35 v1(-448.82,897.64) ; U2.6@-372.05,406.5 -372.05,340.57 C23.2@-362.19,330.71 ; C29.2@-299.23,929.13 -295.28,925.18 U2.64@-295.28,853.35 ; U2.66@-244.09,853.35 v1(-244.09,897.64) ; C33.2@759.83,342.52 v1(799.21,342.52) C35.2@838.6,342.52 ; v1@763.76,1047.26 C14.2@763.76,1082.68 ; v1(795.28,503.94) Y1.4@877.95,503.94 ; C30.2@992.13,704.71 C21.2@992.13,811.04 v1(1023.62,811.02)
  Bottom Layer w15.75: v1(-846.46,-826.77) -834.65,-814.96 U3.3@-788.39,-814.96 ; v1@-846.46,-751.97 U3.5@-788.39,-751.97 ; C44.2@-366.16,-814.94 C44.2@-354.33,-814.94 -354.33,-822.83 v1(-322.83,-822.83) -295.29,-822.83 C48.2@-287.4,-814.94
  Bottom Layer w15.98: Y2.4@-1059.06,-594.49 Y2.4@-1051.18,-594.49
  Bottom Layer w16: C46.2@118.13,-452.77 C46.2@118.13,-440.94 ; v1(299.21,35.43) 303.15,31.5 U5.3@303.15,-19.69 ; v1(421.26,7.87) 433.07,-3.94 C56.1@448.82,-3.94 ; Z4.3@423.94,-136.43 429.13,-131.23 v1(429.13,-98.43) ; U4.3@527.56,-19.69 v1(527.56,35.43)
  Bottom Layer w20: J9.2@-300,-1200 -288.66,-1188.66 Z2.3@-288.66,-1097.05 ; C40.2@102.36,-633.84 C40.2@110.24,-633.84 ; v2@267.72,-771.65 275.59,-771.65 v2(275.59,-763.78) ; RP2.2.2@429.88,245.59 429.88,219.72 v1(444.88,204.72) 459.88,219.72 RP2.3.2@459.88,245.59
  Bottom Layer w31.5: v1@-1279.53,-1279.53 v1(885.83,-1279.53) v1(885.83,-98.43) v1(1279.53,-98.43) 1279.53,1279.53 -1279.53,1279.53 v1@-1279.53,-1279.53
  Bottom Layer w40: v2(-1181.1,118.11) J6.2@-1181.1,212.6 ; v2(-1102.36,118.11) -1102.36,200.79 ; v2(-1023.62,118.11) -1023.62,200.79 ; v2(-944.88,118.11) J6.3@-944.88,208.66
  Bottom Layer w50: C50.2@-1224.41,-429.8 v2(-1224.41,-342.52) v2@-1224.41,-341.85 ; J6.2@-1188.98,212.6 J6.2@-1181.1,212.6 ; C50.2@-1185.04,-429.8 v2(-1185.04,-342.52) v2@-1185.04,-341.85 ; J6.2@-1181.1,224.41 J6.2@-1181.1,212.6 ; C50.2@-1145.67,-429.8 v2(-1145.67,-342.52) v2@-1145.67,-341.85 ; J6.3@-944.88,208.66 J6.3@-940.95,212.6 ; J6.3@-940.95,224.41 J6.3@-940.95,212.6 ; L7.1@-755.91,204.72 -755.91,149.61 Z1.1@-696.85,90.55 ; L7.1@-748.03,212.6 J6.3@-940.95,212.6 ; C51.2@-434.41,-417.32 -430.47,-421.26 v2(-342.52,-421.26) ; C51.2@-429.8,-460.63 v2@-341.85,-460.63 ; C51.2@-429.8,-381.89 v2(-342.52,-381.89) v2@-341.85,-381.89 ; J6.2@-1181.1,212.6 J6.3@-940.95,212.6
  other v1: -1181.1,-1279.53 -1082.68,-1279.53 -984.25,-1279.53 -885.83,-1279.53 -787.4,-1279.53 -688.98,-1279.53 -590.55,-1279.53 -492.13,-1279.53 -393.7,-1279.53 -295.28,-1279.53 -196.85,-1279.53 -98.43,-1279.53 0,-1279.53 98.42,-1279.53 196.85,-1279.53 295.27,-1279.53 393.7,-1279.53 492.13,-1279.53 590.55,-1279.53 688.98,-1279.53 787.4,-1279.53 -1275,-1275 -1279.53,-1181.1 885.83,-1181.1 -1279.53,-1082.68 885.83,-1082.68 -1279.53,-984.25 885.83,-984.25 -1279.53,-885.83 885.83,-885.83 -1279.53,-787.4 885.83,-787.4 -846.46,-748.03 -1279.53,-688.98 885.83,-688.98 -728.35,-669.29 -1279.53,-590.55 885.83,-590.55 -1279.53,-492.13 885.83,-492.13 -1279.53,-393.7 885.83,-393.7 -1279.53,-295.28 885.83,-295.28 -1279.53,-196.85 885.83,-196.85 -1279.53,-98.43 984.25,-98.43 1082.68,-98.43 1181.1,-98.43 -1279.53,0 1279.53,0 -1279.53,98.42 1279.53,98.42 -1279.53,196.85 1279.53,196.85 -173.23,232.28 -409.45,237.66 -1279.53,295.27 1279.53,295.27 -814.96,330.71 362.2,342.52 -370.08,362.2 -1279.53,393.7 1279.53,393.7 -1279.53,492.13 1279.53,492.13 322.83,496.06 -641.73,519.69 322.83,562.99 -1279.53,590.55 1279.53,590.55 -1279.53,688.98 1279.53,688.98 133.86,728.35 -1279.53,787.4 1279.53,787.4 326.77,799.21 326.77,877.95 -1279.53,885.83 1279.53,885.83 -602.36,897.64 -295.28,897.64 -1279.53,984.25 1279.53,984.25 -1279.53,1082.68 1279.53,1082.68 570.87,1153.54 633.86,1153.54 -1279.53,1181.1 1279.53,1181.1 -1275,1275 1275,1275 -1181.1,1279.53 -1082.68,1279.53 -984.25,1279.53 -885.83,1279.53 -787.4,1279.53 -688.98,1279.53 -590.55,1279.53 -492.13,1279.53 -393.7,1279.53 -295.28,1279.53 -196.85,1279.53 -98.43,1279.53 0,1279.53 98.42,1279.53 196.85,1279.53 295.27,1279.53 393.7,1279.53 492.13,1279.53 590.55,1279.53 688.98,1279.53 787.4,1279.53 885.83,1279.53 984.25,1279.53 1082.68,1279.53 1181.1,1279.53
  other v2: -1070.87,-917.32 -279.53,-610.24 -342.52,-460.63 -826.77,196.85 -1059.06,212.6 -826.77,236.22 -1181.1,314.96
GPIO1: D3.1 RP3.1.1 U1.23 | length 863.5
  Top Layer w7.99: RP3.1.1@-225.91,314.96 -218.03,307.09 -47.24,307.09 -39.37,314.96 31.5,314.96 59.06,287.4 v1(98.43,287.4) 0,188.98 v1(0,125.98)
  Bottom Layer w7.99: D3.1@-39.37,-47.24 -39.37,86.61 v1(0,125.98) ; v1(98.43,287.4) 114.17,303.15 U1.23@114.17,410.43
GPIO2: D4.1 RP3.2.1 U1.24 | length 1299.9
  Top Layer w7.99: v1(-500,-244.09) -397.64,-346.45 D4.1@-397.64,-366.14 ; RP3.2.1@-237.72,343.27 -193.66,343.27 v1(-192.91,342.52) -181.1,330.71 59.06,330.71 v1(70.87,318.9)
  Bottom Layer w7.99: v1(-500,-244.09) -500,-196.85 -393.7,-90.55 -393.7,70.87 -192.91,271.65 v1(-192.91,342.52) ; v1(70.87,318.9) 98.43,346.46 U1.24@98.43,410.43
GPIO3: D5.1 RP3.3.1 U1.25 | length 2045.8
  Top Layer w7.99: RP3.3.1@-225.16,374.02 -212.6,374.02 -200.79,385.83 -66.93,385.83 -11.81,440.94 51.18,440.94 70.87,421.26 v1(70.87,354.33) ; v1@161.42,326.77 v1(161.42,334.65) 161.42,354.33 188.98,381.89 535.43,381.89 555.12,362.2 555.12,287.88 591.03,251.97 728.35,251.97 741.28,264.9 837.46,264.9 v1(842.52,259.84) ; v1(931.1,246.06) 1000,314.96 1000,496.06 D5.1@1204.73,700.79
  Mid-Layer 1 w7.99: v1(70.87,354.33) 90.55,334.65 v1(161.42,334.65)
  Bottom Layer w7.99: v1(70.87,354.33) 82.68,366.14 U1.25@82.68,410.43 ; v1(842.52,259.84) 856.3,246.06 v1(931.1,246.06)
GPIO4: U1.27
GPIO5: U1.26
GPIO6: U1.29
GPIO7: U1.28
GPIO16: Q3.4 RP7.1.1 U1.19 | length 1964.6
  Top Layer w10: Q3.4@606.3,-996.06 594.49,-996.06 578.74,-980.31 578.74,-893.7 704.72,-767.72 v1(704.72,-744.09) 704.72,-704.41 RP7.1.1@705.91,-703.23
  Mid-Layer 1 w10: v1(279.53,-161.42) 267.72,-149.61 267.72,-7.87 210.16,49.68 210.16,193.53 286.85,270.22 286.85,271.65 v1(295.28,271.65)
  Bottom Layer w10: U1.19@177.17,410.43 177.17,362.2 267.72,271.65 v1(295.28,271.65) ; v1(279.53,-161.42) 279.53,-177.17 338.58,-236.22 539.37,-236.22 590.55,-287.4 622.05,-287.4 704.72,-370.08 v1(704.72,-744.09)
GPIO17: U1.20
GPIO23: Q1.4 RP5.3.1 U1.34 | length 1711.2
  Top Layer w7.99: v1@49.21,490.16 122.05,417.32 122.05,259.84 181.1,200.79 346.46,200.79 384.07,163.17 501.75,163.17 514.71,176.13 539.37,200.79 586.61,200.79 632.4,155 674,155 743.41,224.41 771.65,224.41 791.34,244.09 v1(791.34,236.22)
  Top Layer w10: v1(809.21,-43.31) 809.21,-17.56 Q1.4@814.96,-11.81 ; v1(874.02,110.24) 878.7,114.92 RP5.3.1@973.94,114.92
  Bottom Layer w7.99: U1.34@-81.69,480.32 -35.43,480.32 -11.81,503.94 39.37,503.94 v1(51.18,492.13) ; v1@791.34,244.09 874.02,161.42 v1(874.02,110.24)
  Bottom Layer w10: v1(809.21,-43.31) 838.58,-43.31 889.76,7.87 889.76,39.37 874.02,55.12 v1(874.02,110.24)
GPIO23_5V: Q1.3 RP6.2.1 U3.12 | length 2064.8
  Top Layer w10: v2(-31.5,-177.17) 27.56,-118.11 111.23,-118.11 202.03,-208.92 550.93,-208.92 586.61,-173.23 v1(586.61,-114.17) ; RP6.2.1@747.28,-155.04 v1(747.28,-98.43) 747.28,-63.74 787.4,-23.62 787.4,47.24 799.21,59.06 Q1.3@814.96,59.06
  Mid-Layer 1 w10: v1(586.61,-114.17) 622.05,-78.74 727.6,-78.74 v1(747.28,-98.43)
  Bottom Layer w10: U3.12@-641.73,-605.32 -641.73,-567.81 -589.67,-515.75 -338.58,-515.75 -248.03,-425.2 -248.03,-381.89 -169.29,-303.15 -169.29,-233.16 -134.47,-198.35 -64.49,-198.35 -43.31,-177.17 v2(-31.5,-177.17)
GPIO25: U1.31
GPIO52: U1.13
GPIO53: U1.10
GPIO60: U1.91
GPIO65: R1.2 U1.88 | length 1577.6
  Top Layer w10: v1(326.77,724.41) 326.77,720.47 336.77,730.47 365.54,730.47 436.26,659.75 436.26,512.56 496.06,452.76 639.32,452.76 692.91,399.17 v1(692.91,287.4) ; R1.2@1196.85,212.58 v1(1196.85,267.72)
  Mid-Layer 1 w10: v1(692.91,287.4) 1177.17,287.4 v1(1196.85,267.72)
  Bottom Layer w10: v1@326.77,720.47 v1(326.77,724.41) ; v1@326.77,724.72 326.77,753.5 348.58,775.31 348.58,907.32 334.65,921.26 U1.88@334.65,1006.89
GPIO91: U1.81
GPIO92: U1.82